# Altium PCB canctuator_4ch.PcbDoc
Units mm, origin at the board's own origin, x right, y up, seen from the top; angles counter-clockwise.
Board outline 13 x 35.56 mm, 2 copper layers (Top Layer, Bottom Layer); 18 components, 24 nets, 112 pads, 46 vias.
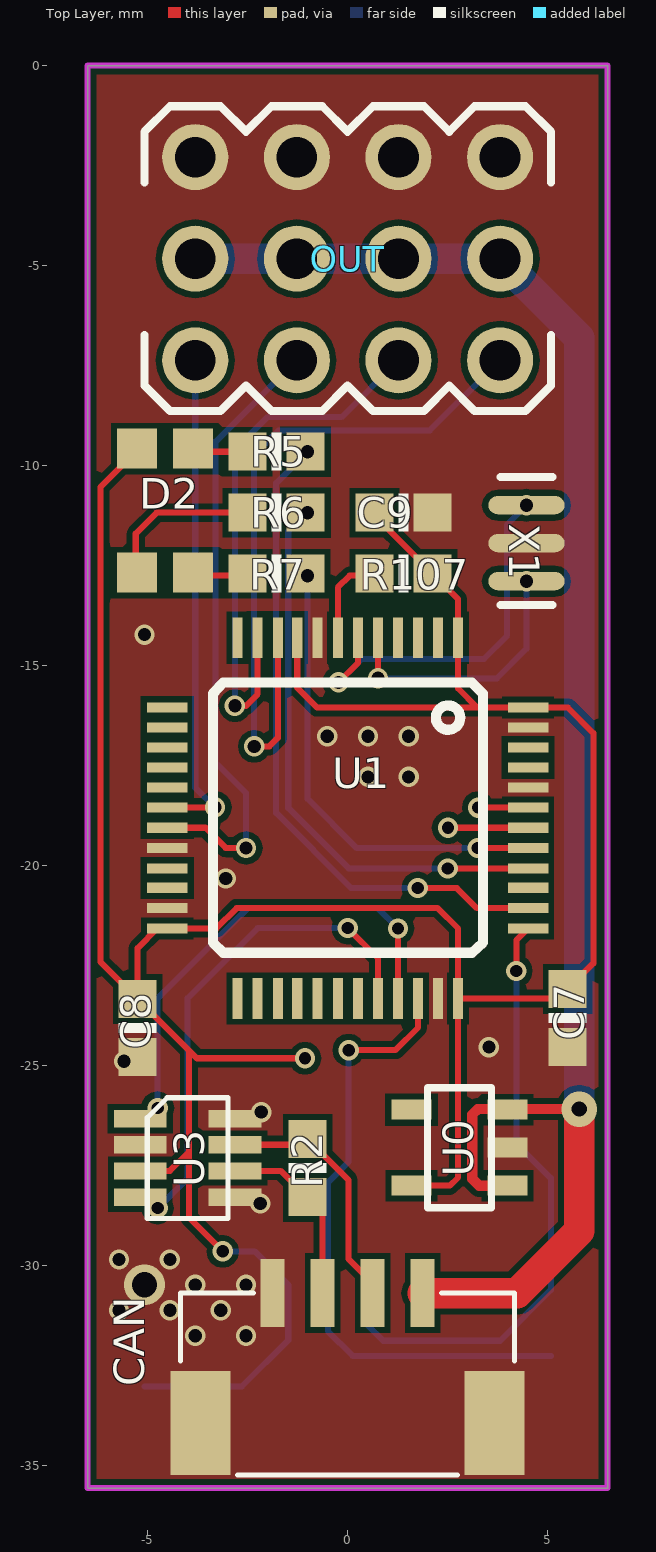
[diagram p0: Top Layer view]
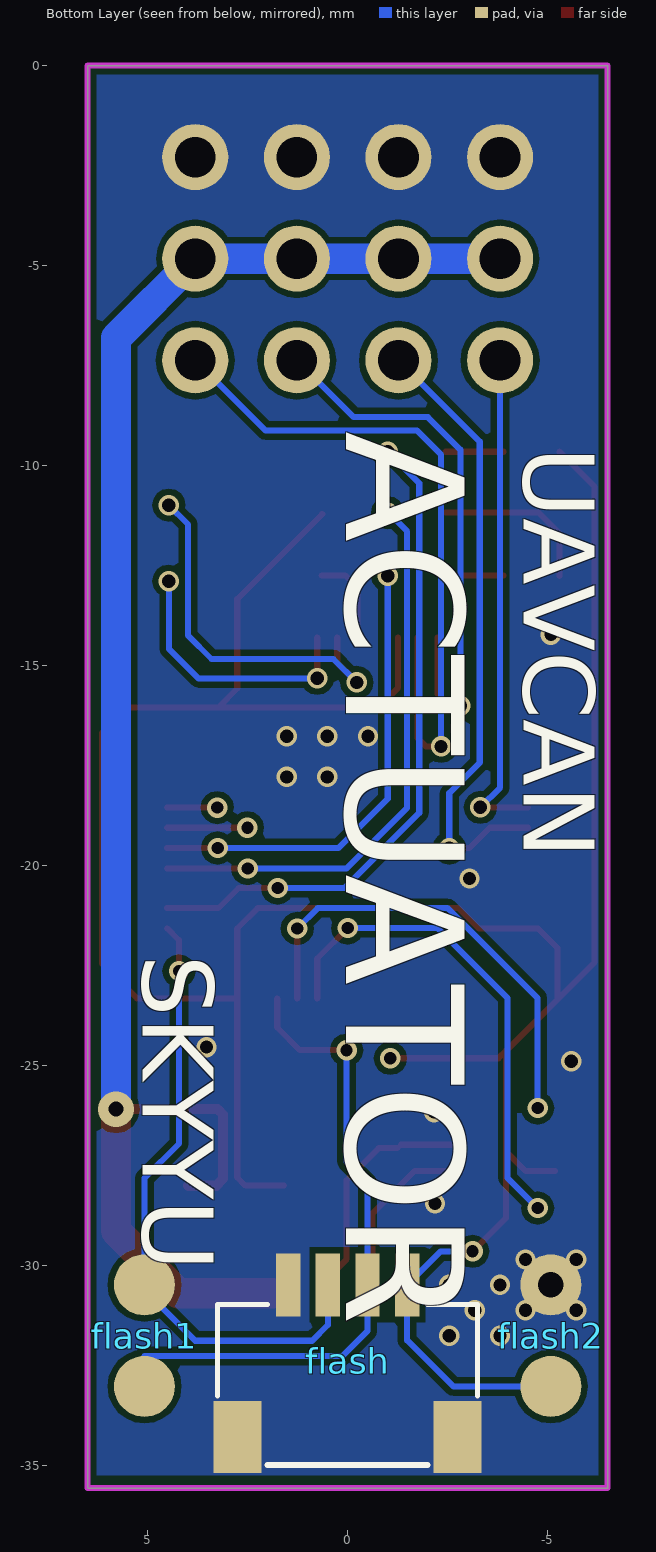
[diagram p1: Bottom Layer view, seen from below]
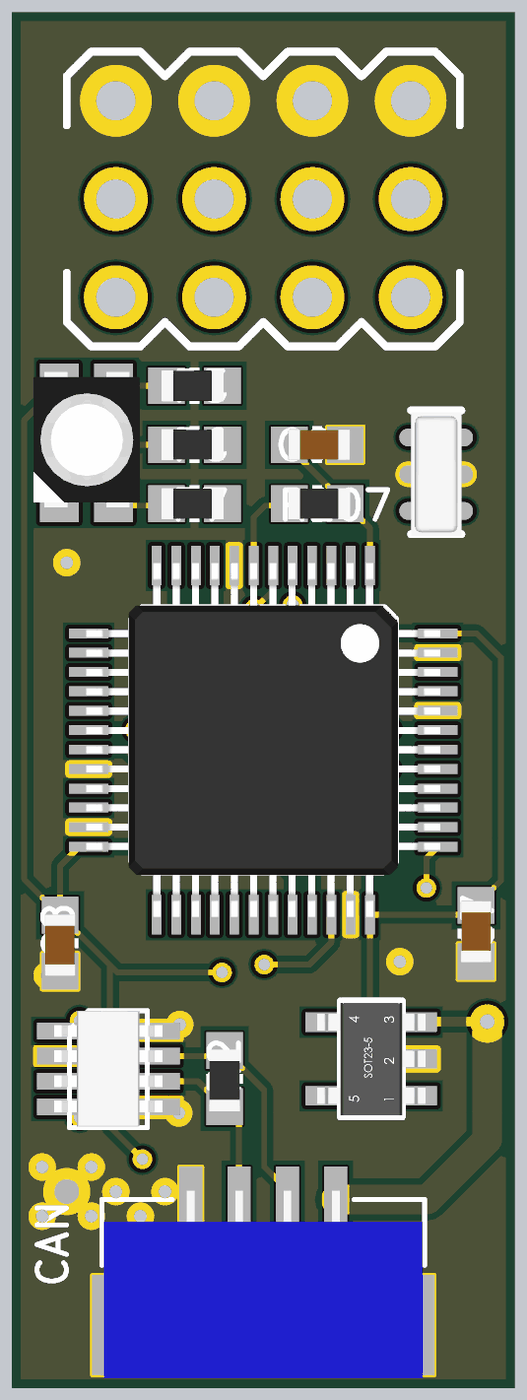
[diagram p2: 3D render of the assembled board from above, using the file's embedded part models]

## Layer stack, top to bottom
Top Solder: solder mask 0.0102, Solder Resist, Dk 3.5
Top Layer: signal copper 0.0356
Dielectric 1: dielectric 0.32, FR-4, Dk 4.8
Bottom Layer: signal copper 0.0356
Bottom Solder: solder mask 0.0102, Solder Resist, Dk 3.5

## Board outline
-6.5,-35.56 6.5,-35.56 6.5,0 -6.5,0

## Design rules (kind name [scope] priority, off if disabled: settings)
Clearance [All] p1: gap=0.152
ComponentClearance [All] p1 off: gap=0.254 collisioncheckmode=3 verticalgap=0.254 showdistances=FALSE
PolygonConnect [All] p1: connectstyle=Direct reliefconductorwidth=0.065 reliefentries=4 polygonreliefangle="90 Angle" airgapwidth=0
RoutingVias [All] p1: holewidth=0.711 width=1.27 viastyle="Through Hole" minholewidth=0.711 minwidth=1.27 maxholewidth=0.711 maxwidth=1.27
SolderMaskExpansion [All] p1: expansion=0.102
Width [All] p1: maxlimit=0.762 minlimit=0.152 preferedwidth=0.254
29 further rules are at their usual default settings.

## Components (designator, comment, footprint, x,y, rotation, side; value= is the part's Value field where it differs from the comment)
C7 "0.1uF" C0603 5.5,-23.81 r90 top
C8 "0.1uF" C0603 -5.25,-24.06 r270 top
C9 "0.1uF" C0603 1.397,-11.176 r0 top
CAN "J-GH1.25-04P" SM04B-GHS-TB 0,-31.81 r180 top
D2 "RGB_3528" RGB_3528 -4.572,-11.176 r270 top
flash "J-SH1.0-04P" SM04B-SRSS-TB 0,-30.48 r0 bottom
flash1 "PAD2" PAD2_2.54 5.08,-31.75 r270 bottom
flash2 "PAD2" PAD2_2.54 -5.08,-31.75 r270 bottom
OUT "Header2.54_PWM_4P" Header2.54-4P-PWM 0,-4.826 r180 top
R2 "120" R0603 -1,-27.56 r270 top
R5 "10k" R0603 -1.778,-9.652 r180 top
R6 "10k" R0603 -1.778,-11.176 r180 top
R7 "10k" R0603 -1.778,-12.7 r180 top
R107 "10K" R0603 1.397,-12.7 r0 top
U0 "MIC5205" SOT23-5 2.794,-27.051 r180 top
U1 "STM32F103C8Tx" LQFP48 0,-18.81 r270 top
U3 "MAX3051" SOT23-8 -4,-27.31 r0 top
X1 "CSTCE8M" XTAL-CSTCE 4.47,-11.938 r90 top

## Footprints (in the part's own frame and the unit in brackets; to place one, negate y for a bottom-side part, rotate by r counter-clockwise, add the part's x,y. Pads: shape width x height; smd on the part's side, far side on the other; paste and mask are expansions set on the pad)
C0603 [mm]
  rect 0.95x0.95 smd mask+0.051: 1(-0.725,0) 2(0.725,0)
  silkscreen extent -0.13,-0.48 0.13,0.47, body extent -0.75,-0.4 0.85,0.4, height 0.6
Header2.54-4P-PWM [mil]
  round 65 hole 40: 0(-150,0) 0(-50,0) 0(50,0) 0(150,0) 1(-150,100) 2(-50,100) 3(50,100) 4(150,100) 99(-150,-100) 99(-50,-100) 99(50,-100) 99(150,-100)
  silkscreen extent -200,-150 200,150
LQFP48 [mil]
  rect 40x10 smd: 1(-177.58,108.68) 2(-177.58,89) 3(-177.58,69.31) 4(-177.58,49.63) 5(-177.58,29.94) 6(-177.58,10.26) 7(-177.58,-9.58) 8(-177.58,-29.58) 9(-177.58,-49.58) 10(-177.58,-68.58) 11(-177.58,-88.58) 12(-177.58,-108.58) 25(177.58,-108.58) 26(177.58,-88.58) 27(177.58,-68.58) 28(177.58,-49.58) 29(177.58,-29.58) 30(177.58,-9.58) 31(177.58,10.26) 32(177.58,29.94) 33(177.58,49.63) 34(177.58,69.31) 35(177.58,89) 36(177.58,108.68)
  rect 10x40 smd: 13(-108.68,-177.58) 14(-89,-177.58) 15(-69.31,-177.58) 16(-49.63,-177.58) 17(-29.94,-177.58) 18(-10.26,-177.58) 19(9.58,-177.58) 20(29.58,-177.58) 21(49.58,-177.58) 22(68.58,-177.58) 23(88.58,-177.58) 24(108.58,-177.58) 37(108.58,177.58) 38(88.58,177.58) 39(68.58,177.58) 40(49.58,177.58) 41(29.58,177.58) 42(9.58,177.58) 43(-10.26,177.58) 44(-29.94,177.58) 45(-49.63,177.58) 46(-69.31,177.58) 47(-89,177.58) 48(-108.68,177.58)
  silkscreen extent -133,-133 133,133, body extent -180,-180 180,180, height 64
PAD2_2.54 [mil]
  round 60 smd: 1(50,0) 2(-50,0)
R0603 [mm]
  rect 0.95x0.95 smd mask+0.051: 1(-0.725,0) 2(0.725,0)
  silkscreen extent -0.13,-0.48 0.13,0.47, body extent -0.75,-0.4 0.85,0.4, height 0.4
RGB_3528 [mm]
  rect 1x1 smd: 1(-1.6,-0.7) 2(-1.6,0.7) 3(1.5,0.7) 4(1.5,-0.7)
  body extent -1.88,-1.36 1.62,1.39, height 1.95
SM04B-GHS-TB [mm]
  rect 0.6x1.7 smd mask+0.051: 1(-1.875,-1.125) 2(-0.625,-1.125) 3(0.625,-1.125) 4(1.875,-1.125)
  rect 1.5x2.6 smd mask+0.051: GND(-3.675,2.125) GND(3.675,2.125)
  silkscreen extent -4.18,-1.12 4.17,3.43, body extent -4.13,-1.35 4.13,3.5, height 4.25
SM04B-SRSS-TB [mil]
  rect 24x62 smd mask+2: 1(-58.5,0) 2(-19.5,0) 3(19.5,0) 4(58.5,0)
  rect 47.24x70.87 smd mask+2: GND(-108.27,149.61) GND(108.27,149.61)
  silkscreen extent -128,19 128,177, body extent -118,-18 118,177, height 116
SOT23-5 [mm]
  rect 1x0.5 smd: 1(-1.2,0.95) 2(-1.2,0) 3(-1.2,-0.95) 4(1.2,-0.95) 5(1.2,0.95)
  silkscreen extent -0.8,-1.5 0.8,1.5, body extent -1.4,-1.45 1.4,1.45, height 1.09
SOT23-8 [mil]
  rect 52x17 smd: 1(-46.63,38.69) 2(-46.63,13.1) 3(-46.63,-12.69) 4(-46.63,-38.69) 5(46.63,-38.69) 6(46.63,-12.69) 7(46.63,13.1) 8(46.63,38.69)
  silkscreen extent -40,-60 40,59, body extent -56,-59 55,59, height 44
XTAL-CSTCE [mil]
  rrect100% 18x75 smd: 1(-37.4,0) 2(0,0) 3(37.4,0)
  silkscreen extent -61,-26 65,26, body extent -63,-26 63,26, height 40

## Part data
C7 C8 C9: library part Capacitor
R2 R5 R6 R7 R107: library part Resistor

## Via types
v1: diameter 0.508, hole 0.33, Top Layer to Bottom Layer, 31 vias
v2: diameter 0.508, hole 0.305, Top Layer to Bottom Layer, 13 vias
v3: diameter 1.016, hole 0.635, Top Layer to Bottom Layer, 1 vias
v4: diameter 0.889, hole 0.381, Top Layer to Bottom Layer, 1 vias

## Nets (pads, with @x,y where several pads share a name; then routed paths per layer and width w, separated by ;. In a path a pad name is that pad's centre, name@x,y a point inside that pad or via, vN(x,y) a via of type N, cw(c..) or ccw(c..) an arc to the next point about the centre after c; other vN are vias at no path point)
3.3V: C7.2 C8.1 C9.1 D2.1 flash2.1 flash.1 R107.2 U0.5 U1.1 U1.9 U1.24 U1.36 U1.48 U3.3 | length 75.4
  Top Layer w0.152: D2.1@-5.297,-9.652 -6.176,-10.53 -6.176,-22.409 C8.1 ; U3.3 -4.442,-27.632 -3.962,-27.153 ; v2(-3.124,-29.642) -3.962,-28.804 -3.962,-27.153 ; U1.9 -1.259,-15.551 -0.761,-16.049 3.239,-16.049 ; v2(-1.067,-24.816) -3.769,-24.816 -3.962,-24.623 ; C9.1@0.635,-11.213 2.761,-13.339 2.761,-15.571 3.239,-16.049 ; U0.5 2.555,-28.001 2.761,-27.796 2.761,-21.571 2.25,-21.06 -2.772,-21.06 -3.28,-21.568 -4.758,-21.568 -5.25,-22.06 C8.1 ; U1.36 5.264,-23.321 C7.2 6.143,-22.442 6.143,-16.684 5.508,-16.049 3.239,-16.049 ; C8.1 -3.962,-24.623 ; -3.962,-27.153 -3.962,-24.623
  Bottom Layer w0.152: flash2.1 -2.642,-33.02 -1.486,-31.864 flash.1 -2.324,-29.642 v2(-3.124,-29.642)
CANH: CAN.2 R2.1 U3.7 | length 5.9
  Top Layer w0.152: U3.7 R2.1@-1.333,-26.977 ; R2.1@-1.25,-27.06 -0.775,-27.06 0.025,-27.86 0.025,-29.835 CAN.2@0.625,-30.435
CANL: CAN.3 R2.2 U3.6 | length 4.6
  Top Layer w0.152: U3.6 -1.678,-27.632 -0.625,-28.685 CAN.3
GND: C7.1 C8.2 C9.2 CAN.4 CAN.GND flash2.2 flash.4 flash.GND OUT.99 U0.2 U1.8 U1.20 U1.23 U1.35 U1.44 U1.47 U3.2 U3.5 U3.8 X1.2
  other v1: -3.81,-31.75 -2.54,-31.75 -5.715,-31.115 -4.445,-31.115 -3.175,-31.115 -3.81,-30.48 -2.54,-30.48 -5.715,-29.845 -4.445,-29.845 -2.184,-28.448 -2.159,-26.162 -5.588,-24.892 3.531,-24.536 -3.048,-20.32 0.508,-17.78 1.524,-17.78 -0.508,-16.764 0.508,-16.764 1.524,-16.764 -5.08,-14.224
  other v3: -5.08,-30.48
NetD2_2: D2.2 R5.2 | length 1.4
  Top Layer w0.152: D2.2@-3.897,-9.652 R5.2@-2.452,-9.652
NetD2_3: D2.3 R7.2 | length 1.4
  Top Layer w0.152: D2.3@-3.896,-12.751 R7.2@-2.452,-12.751
NetD2_4: D2.4 R6.2 | length 4.1
  Top Layer w0.152: D2.4@-5.297,-12.752 -5.297,-11.698 -4.775,-11.176 R6.2@-2.452,-11.176
Netflash1_1: flash1.1 flash.2 U1.34 | length 15.8
  Top Layer w0.152: v2(0.025,-24.613) 1.194,-24.613 1.761,-24.046 U1.34
  Bottom Layer w0.152: v2(0.025,-24.613) 0.025,-27.407 -0.495,-27.927 -0.495,-31.636 0.127,-32.258 5.08,-32.258
Netflash1_2: flash1.2 flash.3 U1.37 | length 15.8
  Top Layer w0.152: v2(4.216,-22.631) 4.216,-21.862 U1.37
  Bottom Layer w0.152: flash.3 0.495,-31.483 0.889,-31.877 3.81,-31.877 5.08,-30.607 5.08,-27.813 4.216,-26.949 v2(4.216,-22.631)
NetOUT_1: OUT.1 U1.10 | length 17.6
  Top Layer w0.152: v1(-2.337,-17.018) -1.956,-17.018 -1.742,-16.804 U1.10
  Bottom Layer w0.152: v1(-2.337,-17.018) -2.337,-9.728 -1.727,-9.119 2.057,-9.119 OUT.1
NetOUT_2: OUT.2 U1.11 | length 13.5
  Top Layer w0.152: v1(-2.819,-16.002) -2.54,-16.002 -2.25,-15.712 U1.11
  Bottom Layer w0.152: v1(-2.819,-16.002) -2.819,-9.601 -2.007,-8.788 -0.152,-8.788 OUT.2
NetOUT_3: OUT.3 U1.19 | length 15.5
  Top Layer w0.152: U1.19 -3.553,-19.053 -3.048,-19.558 v1(-2.54,-19.558)
  Bottom Layer w0.152: v1(-2.54,-19.558) -2.54,-18.186 -3.302,-17.424 -3.302,-9.398 OUT.3
NetOUT_4: OUT.4 U1.18 | length 12.6
  Top Layer w0.152: U1.18 -3.309,-18.549 v1(-3.317,-18.542)
  Bottom Layer w0.152: OUT.4 -3.81,-18.049 v1(-3.317,-18.542)
NetR5_1: R5.1 U1.38 | length 16.6
  Top Layer w0.152: v2(1.75,-20.56) 2.729,-20.56 3.229,-21.06 U1.38
  Bottom Layer w0.152: v1(-1.002,-9.652) -1.79,-10.439 -1.79,-18.683 0.088,-20.56 v2(1.75,-20.56)
NetR6_1: R6.1 U1.40 | length 14.2
  Top Layer w0.152: v2(2.5,-20.069) U1.40
  Bottom Layer w0.152: v1@-0.991,-11.151 -1.485,-11.645 -1.485,-18.557 0.028,-20.069 v2(2.5,-20.069)
  other v1: -1.002,-11.176
NetR7_1: R7.1 U1.41 | length 11.6
  Top Layer w0.152: v2@3.25,-19.561 U1.41
  Bottom Layer w0.152: v1(-1.002,-12.751) -1.002,-18.327 0.231,-19.56 v2(3.25,-19.56)
NetR107_1: R107.1 U1.7 | length 2.3
  Top Layer w0.152: U1.7 -0.243,-13.045 0.051,-12.751 R107.1@0.647,-12.751
NetU1_5: U1.5 X1.1 | length 6.7
  Top Layer w0.152: v1(0.761,-15.316) U1.5
  Bottom Layer w0.152: v1(0.761,-15.316) 3.734,-15.316 4.47,-14.58 v1(4.47,-12.888)
NetU1_6: U1.6 X1.3 | length 9.5
  Top Layer w0.152: v1(-0.229,-15.418) 0.261,-14.929 U1.6
  Bottom Layer w0.152: v1(-0.229,-15.418) 0.356,-14.834 3.404,-14.834 3.988,-14.249 3.988,-11.471 v1(4.47,-10.988)
NetU1_32: U1.32 U3.4 | length 12.4
  Top Layer w0.152: v2(0,-21.56) 0.761,-22.321 U1.32
  Bottom Layer w0.152: v2(-4.75,-28.56) -4,-27.81 -4,-23.31 -2.25,-21.56 v2(0,-21.56)
NetU1_33: U1.33 U3.1 | length 11.7
  Top Layer w0.152: U1.33 v2(1.261,-21.571)
  Bottom Layer w0.152: v2(-4.75,-26.06) -4.75,-23.31 -2.5,-21.06 0.75,-21.06 v2(1.261,-21.571)
NetU1_42: U1.42 | length 2
  Top Layer w0.152: v2(2.507,-19.053) U1.42
NetU1_43: U1.43 | length 1.3
  Top Layer w0.152: v2(3.261,-18.549) U1.43
VIN: CAN.1 OUT.0 U0.1 U0.3 | length 42.6
  Top Layer w0.254: U0.1 3.287,-28.001 3.116,-27.83 3.116,-26.221 3.251,-26.086 v4(5.791,-26.086)
  Top Layer w0.762: CAN.1 4.24,-30.685 5.791,-29.134 v4(5.791,-26.086)
  Bottom Layer w0.762: OUT.0@-3.81,-4.826 3.81,-4.826 5.791,-6.807 v4(5.791,-26.086)
pads on no net: U0.4 U1.2 U1.3 U1.4 U1.12 U1.13 U1.14 U1.15 U1.16 U1.17 U1.21 U1.22 U1.25 U1.26 U1.27 U1.28 U1.29 U1.30 U1.31 U1.39 U1.45 U1.46

## Polygon pours and split planes (outlines as drawn)
GND on Bottom Layer "Bottom Layer-No Net" (solid, remove dead copper, pour order 0): -6.416,0.32 6.584,0.32 6.584,-35.24 -6.416,-35.24
GND on Top Layer "Bottom Layer-No Net" (solid, remove dead copper, pour order 4): -6.666,0.212 6.5,0.212 6.5,-35.348 -6.666,-35.348

## Keep-outs
Keep-Out Layer:
  the board outline again, w0.152

## Silkscreen, mask and mechanical layers (free items; w line width, h text height)
Bottom Overlay:
  text "ACTUATOR" at 1.016,-9.144 h5.08 r90
  text "UAVCAN" at -3.81,-9.525 h3.05 r90
  text "SKYYU" at 5.715,-22.225 h3.05 r90